# Altium PCB MPBoard_ext.PcbDoc (part 3 of 3)
Units mm, origin at the board's own origin, x right, y up, seen from the top; angles counter-clockwise.
Board outline 305 x 110 mm, 2 copper layers (Top Layer, Bottom Layer), stack 1.571 mm thick; 340 components, 268 nets, 1174 pads, 215 vias.
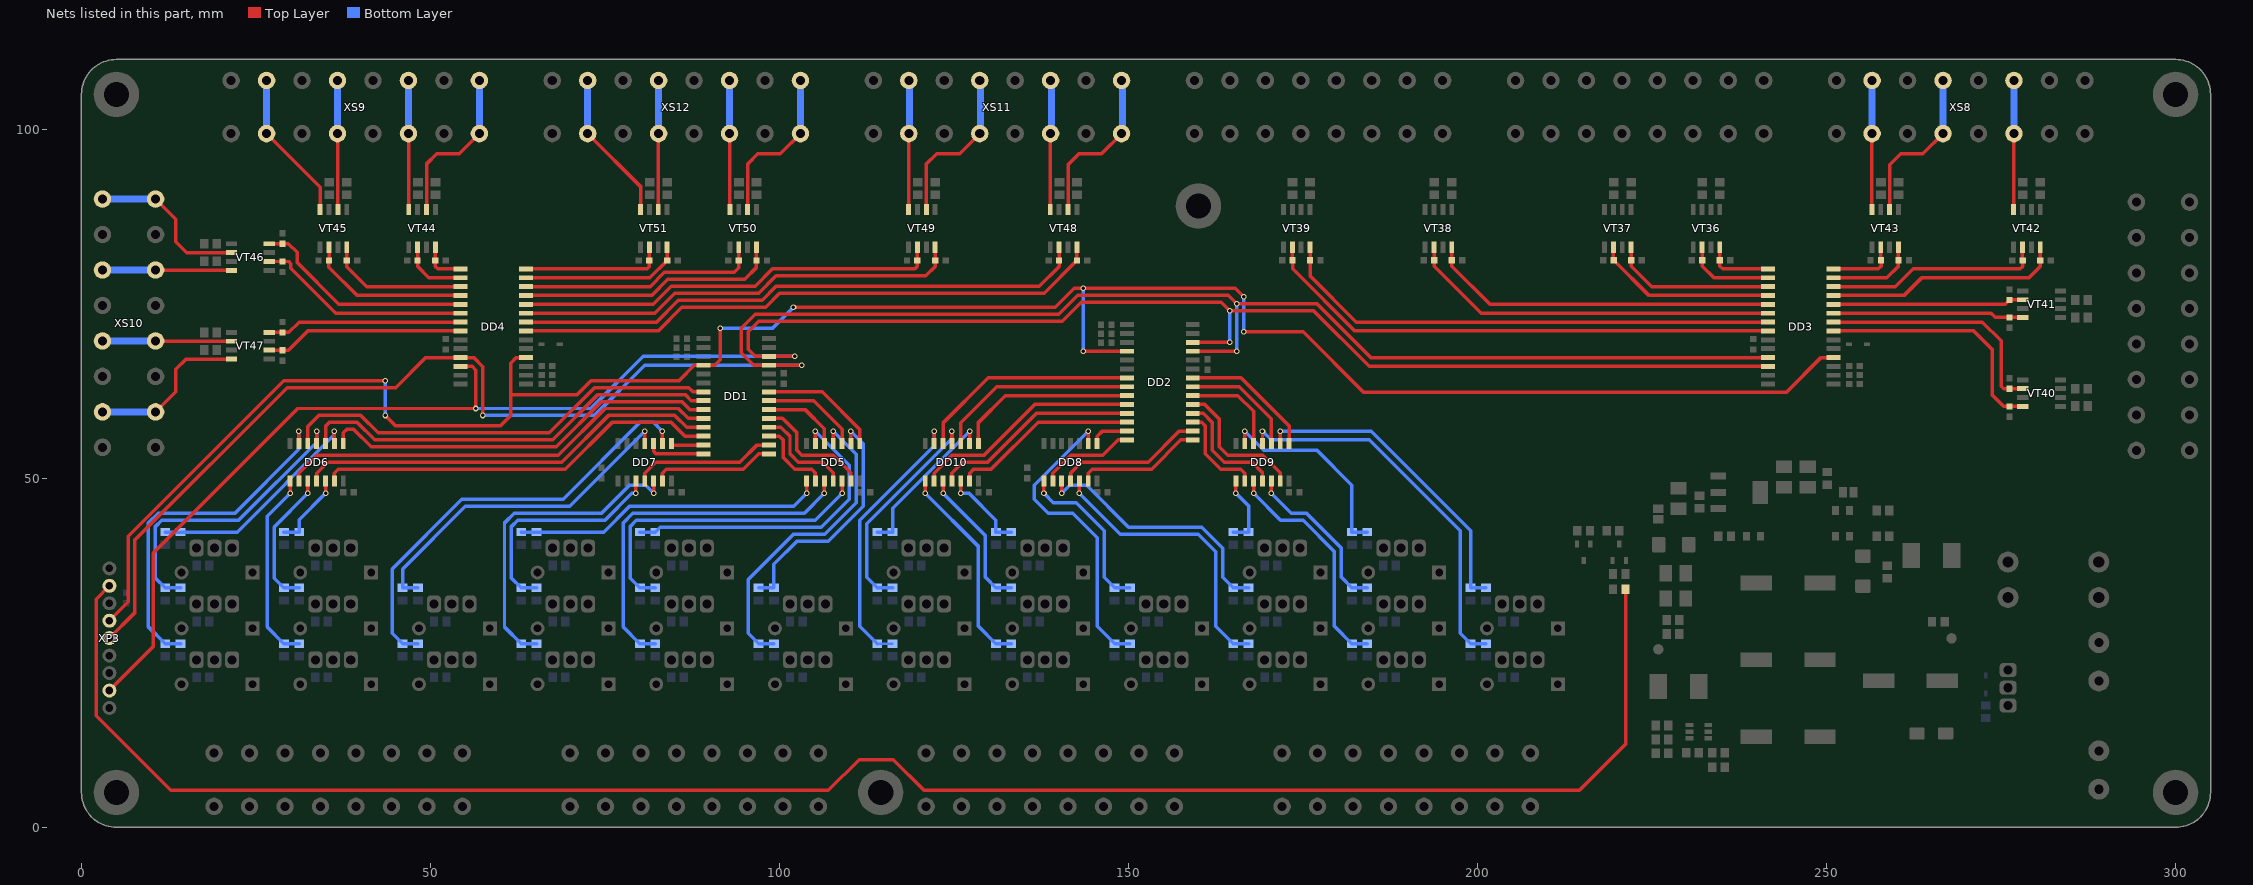
[diagram p3: the nets of this part, all layers, seen from the top]

## Via types
v1: diameter 0.8, hole 0.5, Top Layer to Bottom Layer, 201 vias
v2: diameter 1.6, hole 0.9, Top Layer to Bottom Layer, 8 vias
v3: diameter 1.3, hole 0.6, Top Layer to Bottom Layer, 6 vias

## Nets (pads, with @x,y where several pads share a name; then routed paths per layer and width w, separated by ;. In a path a pad name is that pad's centre, name@x,y a point inside that pad or via, vN(x,y) a via of type N, cw(c..) or ccw(c..) an arc to the next point about the centre after c; other vN are vias at no path point) (continued)
NetVT42_4: VT42.4 XS8.3 XS8.11 | length 18.5
  Top Layer w0.5: VT42.4@276.79,88.5 276.79,99.33 XS8.11@276.84,99.38
  Bottom Layer w1: XS8.11@276.84,99.38 XS8.3@276.84,107
NetVT43_2: VT43.2 XS8.5 XS8.13 | length 23.5
  Top Layer w0.5: VT43.2@259.03,88.5 259.03,94.93 260.6,96.5 263.8,96.5 XS8.13@266.68,99.38
  Bottom Layer w1: XS8.13@266.68,99.38 XS8.5@266.68,107
NetVT43_4: VT43.4 XS8.7 XS8.15 | length 18.5
  Top Layer w0.5: VT43.4@256.49,88.5 256.49,99.35 XS8.15@256.52,99.38
  Bottom Layer w1: XS8.15@256.52,99.38 XS8.7@256.52,107
NetVT44_2: VT44.2 XS9.1 XS9.9 | length 23.5
  Top Layer w0.5: VT44.2@49.43,88.5 49.43,95.03 50.9,96.5 54.12,96.5 XS9.9@57,99.38
  Bottom Layer w1: XS9.9@57,99.38 XS9.1@57,107
NetVT44_4: VT44.4 XS9.3 XS9.11 | length 18.5
  Top Layer w0.5: XS9.11@46.84,99.38 46.89,99.33 VT44.4@46.89,88.5
  Bottom Layer w1: XS9.11@46.84,99.38 XS9.3@46.84,107
NetVT45_2: VT45.2 XS9.5 XS9.13 | length 18.5
  Top Layer w0.5: XS9.13@36.68,99.38 36.73,99.33 VT45.2@36.73,88.5
  Bottom Layer w1: XS9.13@36.68,99.38 XS9.5@36.68,107
NetVT45_4: VT45.4 XS9.7 XS9.15 | length 21.7
  Top Layer w0.5: XS9.15@26.52,99.38 34.19,91.71 VT45.4@34.19,88.5
  Bottom Layer w1: XS9.15@26.52,99.38 XS9.7@26.52,107
NetVT46_2: VT46.2 XS10.1 XS10.9 | length 23.6
  Top Layer w0.5: XS10.9@10.62,90 13.5,87.12 13.5,83.9 15.07,82.33 VT46.2@21.5,82.33
  Bottom Layer w1: XS10.1@3,90 XS10.9@10.62,90
NetVT46_4: VT46.4 XS10.3 XS10.11 | length 18.5
  Top Layer w0.5: XS10.11@10.62,79.84 10.67,79.79 VT46.4@21.5,79.79
  Bottom Layer w1: XS10.3@3,79.84 XS10.11@10.62,79.84
NetVT47_2: VT47.2 XS10.5 XS10.13 | length 18.5
  Top Layer w0.5: XS10.13@10.62,69.68 10.67,69.63 VT47.2@21.5,69.63
  Bottom Layer w1: XS10.5@3,69.68 XS10.13@10.62,69.68
NetVT47_4: VT47.4 XS10.7 XS10.15 | length 23.5
  Top Layer w0.5: XS10.15@10.62,59.52 13.5,62.4 13.5,65.6 14.99,67.09 VT47.4@21.5,67.09
  Bottom Layer w1: XS10.7@3,59.52 XS10.15@10.62,59.52
NetVT48_2: VT48.2 XS11.1 XS11.9 | length 23.6
  Top Layer w0.5: VT48.2@141.33,88.5 141.33,94.93 142.9,96.5 146.12,96.5 XS11.9@149,99.38
  Bottom Layer w1: XS11.9@149.1,99.18 XS11.1@149.1,106.8
NetVT48_4: VT48.4 XS11.3 XS11.11 | length 18.5
  Top Layer w0.5: VT48.4@138.79,88.5 138.79,99.33 XS11.11@138.84,99.38
  Bottom Layer w1: XS11.11@138.94,99.18 XS11.3@138.94,106.8
NetVT49_2: VT49.2 XS11.5 XS11.13 | length 23.6
  Top Layer w0.5: VT49.2@121.03,88.5 121.03,95.03 122.5,96.5 125.8,96.5 XS11.13@128.68,99.38
  Bottom Layer w1: XS11.13@128.78,99.18 XS11.5@128.78,106.8
NetVT49_4: VT49.4 XS11.7 XS11.15 | length 18.5
  Top Layer w0.5: VT49.4@118.49,88.5 118.49,99.35 XS11.15@118.52,99.38
  Bottom Layer w1: XS11.15@118.62,99.18 XS11.7@118.62,106.8
NetVT50_2: VT50.2 XS12.1 XS12.9 | length 23.5
  Top Layer w0.5: VT50.2@95.43,88.5 95.43,95.03 96.9,96.5 100.12,96.5 XS12.9@103,99.38
  Bottom Layer w1: XS12.9@103,99.38 XS12.1@103,107
NetVT50_4: VT50.4 XS12.3 XS12.11 | length 18.5
  Top Layer w0.5: XS12.11@92.84,99.38 92.89,99.33 VT50.4@92.89,88.5
  Bottom Layer w1: XS12.11@92.84,99.38 XS12.3@92.84,107
NetVT51_2: VT51.2 XS12.5 XS12.13 | length 18.5
  Top Layer w0.5: VT51.2@82.63,88.5 82.63,99.33 XS12.13@82.68,99.38
  Bottom Layer w1: XS12.13@82.68,99.38 XS12.5@82.68,107
NetVT51_4: VT51.4 XS12.7 XS12.15 | length 21.6
  Top Layer w0.5: XS12.15@72.52,99.38 80.09,91.81 VT51.4@80.09,88.5
  Bottom Layer w1: XS12.15@72.52,99.38 XS12.7@72.52,107
NSS: DD1.11 DD2.11 DD3.11 DD4.11 XP3.5 | length 311.2
  Top Layer w0.5: XP3.5@4,27.1 7.6,30.7 7.6,41.1 29.5,63 45,63 49.3,67.3 DD4.11@54.3,67.3 56.2,67.3 57.5,66 v1(57.5,59) ; DD1.11@98.5,66.19 v1(103.2,66.19) ; DD1.11@98.5,66.2 96.3,66.2 94.5,68 94.5,71.5 96.5,73.5 140,73.5 142.7,76.2 164.3,76.2 v1(165.5,75) 177,75 184.7,67.3 DD3.11@241.6,67.3 ; DD2.11@159.2,68.2 v1(165.5,68.2)
  Bottom Layer w0.5: v1(57.5,59) 73.5,59 80.69,66.19 v1(103.2,66.19) ; v1(165.5,68.2) v1(165.5,75)
PObuf_1: DD7.12 R16.1 R17.2 | length 46.3
  Top Layer w0.5: v1@81.96,47.855 DD7.12@81.96,49.6
  Bottom Layer w0.5: R16.1@65.2,26.3 R17.2@63,26.3 60.6,28.7 60.6,43.6 62,45 74.5,45 77,47.5 78.5,49 80.815,49 v1(81.965,47.85)
PObuf_2: DD7.10 R19.1 R20.2 | length 33.1
  Top Layer w0.5: v1@79.42,47.855 DD7.10@79.42,49.6
  Bottom Layer w0.5: R19.1@65.2,34.3 R20.2@63,34.3 61.6,35.7 61.6,43.1 62.5,44 75,44 78.85,47.85 v1(79.425,47.85)
PObuf_3: DD5.8 R22.1 R23.2 | length 44.9
  Top Layer w0.5: v1@103.88,47.855 DD5.8@103.88,49.6
  Bottom Layer w0.5: R23.2@63,42.3 R22.1@65.2,42.3 74.8,42.3 78.5,46 102.035,46 v1(103.885,47.85)
PObuf_4: DD5.10 R25.1 R26.2 | length 52.8
  Top Layer w0.5: v1@106.42,47.855 DD5.10@106.42,49.6
  Bottom Layer w0.5: R25.1@82.2,26.3 R26.2@80,26.3 77.6,28.7 77.6,43.6 79,45 103.575,45 v1(106.425,47.85)
PObuf_5: DD5.12 R28.1 R29.2 | length 45.7
  Top Layer w0.5: v1@108.96,47.855 DD5.12@108.96,49.6
  Bottom Layer w0.5: R28.1@82.2,34.3 R29.2@80,34.3 78.6,35.7 78.6,43.1 79.5,44 105.115,44 v1(108.965,47.85)
PObuf_6: DD5.6 R31.1 R32.2 | length 45.5
  Top Layer w0.5: DD5.6@105.15,55 v1@105.15,56.745
  Bottom Layer w0.5: R32.2@80,42.3 R31.1@82.2,42.3 82.9,43 106,43 110,47 110,51.895 v1(105.145,56.75)
PObuf_7: DD5.4 R34.1 R35.2 | length 45.4
  Top Layer w0.5: DD5.4@107.69,55 v1@107.69,56.745
  Bottom Layer w0.5: R34.1@99.2,26.3 R35.2@97,26.3 95.5,27.8 95.5,35.5 102,42 106.5,42 111,46.5 111,53.435 v1(107.685,56.75)
PObuf_8: DD5.2 R37.1 R38.2 | length 35.1
  Top Layer w0.5: DD5.2@110.23,55 v1@110.23,56.745
  Bottom Layer w0.5: R38.2@97,34.3 R37.1@99.2,34.3 99.2,37.7 102.5,41 107,41 112,46 112,54.975 v1(110.225,56.75)
PObuf_9: DD6.6 R40.1 R41.2 | length 50.8
  Top Layer w0.5: DD6.6@31.15,55 v1@31.15,56.745
  Bottom Layer w0.5: R40.1@14.2,26.3 R41.2@12,26.3 9.6,28.7 9.6,43.6 11,45 22,45 31.145,54.145 v1(31.145,56.75)
PObuf_10: DD6.4 R43.1 R44.2 | length 43
  Top Layer w0.5: DD6.4@33.69,55 v1@33.69,56.745
  Bottom Layer w0.5: R43.1@14.2,34.3 R44.2@12,34.3 10.6,35.7 10.6,43.1 11.5,44 22.5,44 33.685,55.185 v1(33.685,56.75)
PObuf_11: DD6.2 R46.1 R47.2 | length 32.3
  Top Layer w0.5: DD6.2@36.23,55 v1@36.23,56.745
  Bottom Layer w0.5: R47.2@12,42.3 R46.1@14.2,42.3 22.3,42.3 36.225,56.225 v1(36.225,56.75)
PObuf_12: DD6.8 R49.1 R50.2 | length 27.8
  Top Layer w0.5: v1@29.88,47.855 DD6.8@29.88,49.6
  Bottom Layer w0.5: v1(29.885,47.85) 26.6,44.565 26.6,28.7 R50.2@29,26.3 R49.1@31.2,26.3
PObuf_13: DD6.10 R52.1 R53.2 | length 20.1
  Top Layer w0.5: v1@32.42,47.855 DD6.10@32.42,49.6
  Bottom Layer w0.5: R52.1@31.2,34.3 R53.2@29,34.3 27.6,35.7 27.6,43.025 v1(32.425,47.85)
PObuf_14: DD6.12 R55.1 R56.2 | length 11.1
  Top Layer w0.5: v1@34.96,47.855 DD6.12@34.96,49.6
  Bottom Layer w0.5: R56.2@29,42.3 R55.1@31.2,42.3 31.2,44.085 v1(34.965,47.85)
PObuf_15: DD7.2 R58.1 R59.2 | length 63.2
  Top Layer w0.5: DD7.2@83.23,55 v1@83.23,56.745
  Bottom Layer w0.5: R58.1@48.2,26.3 R59.2@46,26.3 44.5,27.8 44.5,37 54.5,47 69,47 80,58 81.975,58 v1(83.225,56.75)
PObuf_16: DD7.4 R61.1 R62.2 | length 49.5
  Top Layer w0.5: DD7.4@80.69,55 v1@80.69,56.745
  Bottom Layer w0.5: R61.1@48.2,34.3 R62.2@46,34.3 46,37 55,46 69.935,46 v1(80.685,56.75)
PObuf_17: DD8.12 R67.1 R68.2 | length 41.2
  Top Layer w0.5: DD8.12@142.96,49.6 142.96,47.855 v1(142.965,47.85)
  Bottom Layer w0.5: v1(142.965,47.85) 148.815,42 160,42 162.5,39.5 162.5,28.8 R68.2@165,26.3 R67.1@167.2,26.3
PObuf_18: DD8.10 R70.1 R71.2 | length 37.6
  Top Layer w0.5: DD8.10@140.42,49.6 140.42,47.855 v1(140.425,47.85)
  Bottom Layer w0.5: v1(140.425,47.85) 141.575,49 144,49 150,43 160.5,43 163.5,40 163.5,35.8 R71.2@165,34.3 R70.1@167.2,34.3
PObuf_19: DD9.8 R73.1 R74.2 | length 10.3
  Top Layer w0.5: DD9.8@165.38,49.6 165.38,47.855 v1(165.385,47.85)
  Bottom Layer w0.5: R74.2@165,42.3 R73.1@167.2,42.3 167.2,46.035 v1(165.385,47.85)
PObuf_20: DD9.10 R76.1 R77.2 | length 33.2
  Top Layer w0.5: DD9.10@167.92,49.6 167.92,47.855 v1(167.925,47.85)
  Bottom Layer w0.5: v1(167.925,47.85) 171.775,44 175,44 179.5,39.5 179.5,28.8 R77.2@182,26.3 R76.1@184.2,26.3
PObuf_21: DD9.12 R79.1 R80.2 | length 23.6
  Top Layer w0.5: DD9.12@170.46,49.6 170.46,47.855 v1(170.465,47.85)
  Bottom Layer w0.5: v1(170.465,47.85) 173.315,45 175.5,45 180.5,40 180.5,35.8 R80.2@182,34.3 R79.1@184.2,34.3
PObuf_22: DD9.6 R82.1 R83.2 | length 29.2
  Top Layer w0.5: v1(166.645,56.75) 166.65,56.745 DD9.6@166.65,55
  Bottom Layer w0.5: v1(166.645,56.75) 169.395,54 177,54 182,49 R83.2@182,42.3 R82.1@184.2,42.3
PObuf_23: DD9.4 R85.1 R86.2 | length 55
  Top Layer w0.5: v1(169.185,56.75) 169.19,56.745 DD9.4@169.19,55
  Bottom Layer w0.5: v1(169.185,56.75) 170.435,55.5 184.5,55.5 197.5,42.5 197.5,27.8 R86.2@199,26.3 R85.1@201.2,26.3
PObuf_24: DD9.2 R88.1 R89.2 | length 45.3
  Top Layer w0.5: v1(171.725,56.75) 171.73,56.745 DD9.2@171.73,55
  Bottom Layer w0.5: v1(171.725,56.75) 184.75,56.75 193.5,48 199,42.5 R89.2@199,34.3 R88.1@201.2,34.3
PObuf_25: DD10.6 R91.1 R92.2 | length 39.8
  Top Layer w0.5: v1(122.145,56.75) 122.15,56.745 DD10.6@122.15,55
  Bottom Layer w0.3: R92.2@114,26.3 R91.1@116.2,26.3
  Bottom Layer w0.5: R92.2@114,26.3 111.5,28.8 111.5,44 122.145,54.645 v1(122.145,56.75)
PObuf_26: DD10.4 R94.1 R95.2 | length 32.1
  Top Layer w0.5: v1(124.685,56.75) 124.69,56.745 DD10.4@124.69,55
  Bottom Layer w0.5: R94.1@116.2,34.3 R95.2@114,34.3 112.5,35.8 112.5,40 112.5,43.5 124.685,55.685 v1(124.685,56.75)
PObuf_27: DD10.2 R97.1 R98.2 | length 23
  Top Layer w0.5: v1(127.225,56.75) 127.23,56.745 DD10.2@127.23,55
  Bottom Layer w0.5: R98.2@114,42.3 R97.1@116.2,42.3 116.2,45.725 v1(127.225,56.75)
PObuf_28: DD10.8 R100.1 R101.2 | length 29.7
  Top Layer w0.5: DD10.8@120.88,49.6 120.88,47.855 v1(120.885,47.85)
  Bottom Layer w0.5: v1(120.885,47.85) 128.5,40.235 128.5,28.8 R101.2@131,26.3 R100.1@133.2,26.3
PObuf_29: DD10.10 R103.1 R104.2 | length 20.6
  Top Layer w0.5: DD10.10@123.42,49.6 123.42,47.855 v1(123.425,47.85)
  Bottom Layer w0.5: v1(123.425,47.85) 129.5,41.775 129.5,35.8 R104.2@131,34.3 R103.1@133.2,34.3
PObuf_30: DD10.12 R106.1 R107.2 | length 12.3
  Top Layer w0.5: DD10.12@125.96,49.6 125.96,47.855 v1(125.965,47.85)
  Bottom Layer w0.5: v1(125.965,47.85) 127.15,47.85 131,44 R107.2@131,42.3 R106.1@133.2,42.3
PObuf_31: DD8.2 R109.1 R110.2 | length 44.4
  Top Layer w0.5: v1(144.225,56.75) 144.23,56.745 DD8.2@144.23,55
  Bottom Layer w0.5: v1(144.225,56.75) 136.5,49.025 136.5,47 138.5,45 142,45 145.5,41.5 145.5,28.8 R110.2@148,26.3 R109.1@150.2,26.3
PObuf_32: DD8.8 R112.1 R113.2 | length 23.6
  Top Layer w0.5: DD8.8@137.88,49.6 137.88,47.855 v1(137.885,47.85)
  Bottom Layer w0.5: v1(137.885,47.85) 139.235,46.5 142.5,46.5 146.5,42.5 146.5,35.8 R113.2@148,34.3 R112.1@150.2,34.3
pwrOut_1: DD1.1 DD7.13 | length 17.6
  Top Layer w0.5: DD7.13@83.23,49.6 83.23,50.75 83.78,51.3 94.8,51.3 97,53.5 DD1.1@98.5,53.5
pwrOut_2: DD1.2 DD7.11 | length 20.6
  Top Layer w0.5: DD7.11@80.69,49.6 80.69,50.75 82.24,52.3 94.3,52.3 96.77,54.77 DD1.2@98.5,54.77
pwrOut_3: DD1.3 DD5.9 | length 11.5
  Top Layer w0.5: DD1.3@98.5,56.04 99.96,56.04 100.5,55.5 100.5,53 102.2,51.3 104.6,51.3 105.15,50.75 DD5.9@105.15,49.6
pwrOut_4: DD1.4 DD5.11 | length 14.6
  Top Layer w0.5: DD1.4@98.5,57.31 100.19,57.31 101.5,56 101.5,53.5 102.7,52.3 106.2,52.3 107.69,50.81 DD5.11@107.69,49.6
pwrOut_5: DD1.5 DD5.13 | length 17.6
  Top Layer w0.5: DD1.5@98.5,58.58 100.42,58.58 102.5,56.5 102.5,54 103.2,53.3 107.7,53.3 110.23,50.77 DD5.13@110.23,49.6
pwrOut_6: DD1.6 DD5.5 | length 11.1
  Top Layer w0.5: DD1.6@98.5,59.85 103.65,59.85 106.42,57.08 DD5.5@106.42,55
pwrOut_7: DD1.7 DD5.3 | length 14.2
  Top Layer w0.5: DD1.7@98.5,61.12 104.88,61.12 108.96,57.04 DD5.3@108.96,55
pwrOut_8: DD1.8 DD5.1 | length 17.2
  Top Layer w0.5: DD1.8@98.5,62.39 106.11,62.39 111.5,57 DD5.1@111.5,55
pwrOut_9: DD1.21 DD6.5 | length 63.7
  Top Layer w0.5: DD6.5@32.42,55 32.42,57.42 34,59 40,59 42.5,56.5 67,56.5 73.5,63 87,63 87.61,62.39 DD1.21@89.1,62.39
pwrOut_10: DD1.22 DD6.3 | length 60.9
  Top Layer w0.5: DD6.3@34.96,55 34.96,57.46 35.5,58 39.5,58 42,55.5 67.5,55.5 74,62 86.5,62 87.38,61.12 DD1.22@89.1,61.12
pwrOut_11: DD1.23 DD6.1 | length 57.5
  Top Layer w0.5: DD6.1@37.5,55 37.5,56.5 38,57 39,57 41.5,54.5 68,54.5 74.5,61 86,61 87.15,59.85 DD1.23@89.1,59.85
pwrOut_12: DD1.24 DD6.9 | length 63.5
  Top Layer w0.5: DD6.9@31.15,49.6 31.15,50.75 33.7,53.3 68.3,53.3 75,60 85.5,60 86.92,58.58 DD1.24@89.1,58.58
pwrOut_13: DD1.25 DD6.11 | length 60.7
  Top Layer w0.5: DD6.11@33.69,49.6 33.69,50.75 35.24,52.3 68.8,52.3 75.5,59 85,59 86.69,57.31 DD1.25@89.1,57.31
pwrOut_14: DD1.26 DD6.13 | length 57.8
  Top Layer w0.5: DD6.13@36.23,49.6 36.23,50.75 36.78,51.3 69.3,51.3 76,58 84.5,58 86.46,56.04 DD1.26@89.1,56.04
pwrOut_15: DD1.27 DD7.1 | length 4.8
  Top Layer w0.5: DD7.1@84.5,55 84.5,54.87 84.6,54.77 DD1.27@89.1,54.77
pwrOut_16: DD1.28 DD7.3 | length 8.4
  Top Layer w0.5: DD7.3@81.96,55 81.96,53.84 82.3,53.5 DD1.28@89.1,53.5
pwrOut_17: DD2.1 DD8.13 | length 18.1
  Top Layer w0.5: DD8.13@144.23,49.6 144.23,50.75 144.78,51.3 153.3,51.3 157.5,55.5 DD2.1@159.2,55.5
pwrOut_18: DD2.2 DD8.11 | length 21.2
  Top Layer w0.5: DD8.11@141.69,49.6 141.69,50.75 143.24,52.3 152.8,52.3 157.27,56.77 DD2.2@159.2,56.77
pwrOut_19: DD2.3 DD9.9 | length 14
  Top Layer w0.5: DD2.3@159.2,58.04 160.46,58.04 161,57.5 161,53.5 163.2,51.3 166.1,51.3 166.65,50.75 DD9.9@166.65,49.6
pwrOut_20: DD2.4 DD9.11 | length 17.1
  Top Layer w0.5: DD2.4@159.2,59.31 160.69,59.31 162,58 162,54 163.7,52.3 167.7,52.3 169.19,50.81 DD9.11@169.19,49.6
pwrOut_21: DD2.5 DD9.13 | length 20.1
  Top Layer w0.5: DD2.5@159.2,60.58 160.92,60.58 163,58.5 163,54.5 164.2,53.3 169.2,53.3 171.73,50.77 DD9.13@171.73,49.6
pwrOut_22: DD2.6 DD9.5 | length 14.2
  Top Layer w0.5: DD2.6@159.2,61.85 165.65,61.85 167.92,59.58 DD9.5@167.92,55
pwrOut_23: DD2.7 DD9.3 | length 16.7
  Top Layer w0.5: DD2.7@159.2,63.12 165.88,63.12 170.46,58.54 DD9.3@170.46,55
pwrOut_24: DD2.8 DD9.1 | length 19.2
  Top Layer w0.5: DD2.8@159.2,64.39 166.11,64.39 173,57.5 DD9.1@173,55
pwrOut_25: DD2.21 DD10.5 | length 32
  Top Layer w0.5: DD10.5@123.42,55 123.42,57.92 129.89,64.39 DD2.21@149.8,64.39
pwrOut_26: DD2.22 DD10.3 | length 28.9
  Top Layer w0.5: DD10.3@125.96,55 125.96,57.96 131.12,63.12 DD2.22@149.8,63.12
pwrOut_27: DD2.23 DD10.1 | length 25.9
  Top Layer w0.5: DD10.1@128.5,55 128.5,58 132.35,61.85 DD2.23@149.8,61.85
pwrOut_28: DD2.24 DD10.9 | length 32.9
  Top Layer w0.5: DD10.9@122.15,49.6 122.15,50.75 124.7,53.3 129.3,53.3 136.58,60.58 DD2.24@149.8,60.58
pwrOut_29: DD2.25 DD10.11 | length 29.8
  Top Layer w0.5: DD10.11@124.69,49.6 124.69,50.75 126.24,52.3 129.8,52.3 136.81,59.31 DD2.25@149.8,59.31
pwrOut_30: DD2.26 DD10.13 | length 26.7
  Top Layer w0.5: DD10.13@127.23,49.6 127.23,50.75 127.78,51.3 130.3,51.3 137.04,58.04 DD2.26@149.8,58.04
pwrOut_31: DD2.27 DD8.1 | length 5.6
  Top Layer w0.5: DD8.1@145.5,55 145.5,56 146.27,56.77 DD2.27@149.8,56.77
pwrOut_32: DD2.28 DD8.9 | length 13.8
  Top Layer w0.5: DD8.9@139.15,49.6 139.15,50.75 141.7,53.3 146.3,53.3 148.5,55.5 DD2.28@149.8,55.5
Reset: DD1.18 DD2.18 DD3.18 DD4.18 XP3.6 | length 318.4
  Top Layer w0.5: XP3.6@4,29.6 6.7,32.3 6.7,41.7 29,64 v1(43.5,64) ; v1(43.5,59) 45,57.5 60,57.5 61.5,59 61.5,62 ; DD4.18@63.7,67.3 62.3,67.3 61.5,66.5 61.5,62 ; v1(91.5,71.5) 91.5,67 90.7,66.2 DD1.18@89.1,66.2 87.8,66.2 85.6,64 73,64 71,62 61.5,62 ; v1(102,74.5) 139.5,74.5 142.2,77.2 v1(143.5,77.2) 165.3,77.2 v1(166.5,76) ; v1(143.5,68.2) DD2.18@149.8,68.2 ; v1(166.5,71) 175,71 183.7,62.3 244.2,62.3 249.2,67.3 DD3.18@251,67.3
  Bottom Layer w0.5: v1(43.5,59) v1(43.5,64) ; v1(91.5,71.5) 99,71.5 v1(102,74.5) ; v1(143.5,68.2) v1(143.5,77.2) ; v1(166.5,71) v1(166.5,76)
Resolution_5V: R9.1 XP3.8 | length 271.5
  Top Layer w0.5: XP3.8@4,34.6 2.1,32.7 2.1,16 12.8,5.3 107,5.3 111.4,9.7 116.3,9.7 120.7,5.3 214.6,5.3 221.2,11.9 R9.1@221.2,34.1
SCK: DD1.12 DD2.12 DD3.12 DD4.12 XP3.2 | length 304.9
  Top Layer w0.5: XP3.2@4,19.6 10.3,25.9 10.3,39.3 31,60 v1(56.5,60) 56.5,65.5 55.97,66.03 DD4.12@54.3,66.03 ; DD1.12@98.5,67.46 102.17,67.46 v1(102.2,67.49) ; DD1.12@98.5,67.47 96.53,67.47 95.5,68.5 95.5,71 97,72.5 140.5,72.5 143.2,75.2 163.3,75.2 v1(164.5,74) 176.5,74 184.47,66.03 DD3.12@241.6,66.03 ; DD2.12@159.2,69.47 164.47,69.47 v1(164.5,69.5)
  Bottom Layer w0.5: v1(56.5,60) 73,60 80.49,67.49 v1(102.2,67.49) ; v1(164.5,69.5) v1(164.5,74)
sensIN_1: DD3.1 R115.1 VT36.8 | length 9.8
  Top Layer w0.5: VT36.8@234.7,83.1 R115.1@234.7,81.25 234.7,80.4 235.1,80 DD3.1@241.6,80
sensIN_2: DD3.2 R116.1 VT36.6 | length 12.8
  Top Layer w0.5: R116.1@232.16,81.29 VT36.6@232.16,83.1 ; R116.1@232.2,81.25 232.2,80.4 233.87,78.73 DD3.2@241.6,78.73
sensIN_3: DD3.3 R117.1 VT37.8 | length 23.5
  Top Layer w0.5: VT37.8@222,83.1 R117.1@222,81.25 222,80.4 224.94,77.46 DD3.3@241.6,77.46
sensIN_4: DD3.4 R118.1 VT37.6 | length 26
  Top Layer w0.5: R118.1@219.46,81.29 VT37.6@219.46,83.1 ; R118.1@219.5,81.25 224.56,76.19 DD3.4@241.6,76.19
sensIN_5: DD3.5 R119.1 VT38.8 | length 50.3
  Top Layer w0.5: VT38.8@196.3,83.1 R119.1@196.3,81.25 196.3,80.4 201.78,74.92 DD3.5@241.6,74.92
sensIN_6: DD3.6 R120.1 VT38.6 | length 53.3
  Top Layer w0.5: R120.1@193.76,81.29 VT38.6@193.76,83.1 ; R120.1@193.8,81.25 193.8,80.4 200.55,73.65 DD3.6@241.6,73.65
sensIN_7: DD3.7 R121.1 VT39.8 | length 72.4
  Top Layer w0.5: VT39.8@176,83.1 R121.1@176,81.25 176,79 182.62,72.38 DD3.7@241.6,72.38
sensIN_8: DD3.8 R122.1 VT39.6 | length 74.8
  Top Layer w0.5: R122.1@173.46,81.29 VT39.6@173.46,83.1 ; R122.1@173.5,81.25 173.5,80 182.39,71.11 DD3.8@241.6,71.11
sensIN_9: DD3.21 R123.1 VT40.8 | length 35.4
  Top Layer w0.5: DD3.21@251,71.11 271.09,71.11 273.7,68.5 273.7,61.95 275.35,60.3 R123.1@276.2,60.3 VT40.8@278.1,60.3
sensIN_10: DD3.22 R124.1 VT40.6 | length 34.9
  Top Layer w0.5: DD3.22@251,72.38 272.32,72.38 275,69.7 275,63.2 275.36,62.84 R124.1@276.21,62.84 ; R124.1@276.2,62.85 R124.1@276.21,62.84 ; VT40.6@278.1,62.84 R124.1@276.21,62.84
sensIN_11: DD3.23 R125.1 VT41.8 | length 27.4
  Top Layer w0.5: DD3.23@251,73.65 273.55,73.65 274.15,73.05 R125.1@276.2,73.05 276.21,73.04 VT41.8@278.1,73.04
sensIN_12: DD3.24 R126.1 VT41.6 | length 27.4
  Top Layer w0.5: DD3.24@251,74.92 275.57,74.92 R126.1@276.2,75.55 276.23,75.58 VT41.6@278.1,75.58
sensIN_13: DD3.25 R127.1 VT42.8 | length 34.1
  Top Layer w0.5: DD3.25@251,76.19 261.09,76.19 263.6,78.7 278.95,78.7 280.6,80.35 R127.1@280.6,81.2 VT42.8@280.6,83.1
sensIN_14: DD3.26 R128.1 VT42.6 | length 31
  Top Layer w0.5: DD3.26@251,77.46 259.86,77.46 262.4,80 277.75,80 278.1,80.35 R128.1@278.1,81.2 ; R128.1@278.06,81.24 VT42.6@278.06,83.1
sensIN_15: DD3.27 R129.1 VT43.8 | length 12.7
  Top Layer w0.5: DD3.27@251,78.73 258.63,78.73 260.3,80.4 R129.1@260.3,81.25 VT43.8@260.3,83.1
sensIN_16: DD3.28 R130.1 VT43.6 | length 9.6
  Top Layer w0.5: DD3.28@251,80 257.4,80 257.8,80.4 R130.1@257.8,81.25 ; R130.1@257.76,81.29 VT43.6@257.76,83.1
sensIN_17: DD4.1 R150.1 VT44.8 | length 6.5
  Top Layer w0.5: VT44.8@50.7,83.1 R150.1@50.7,81.2 50.7,80.35 51.05,80 DD4.1@54.3,80
sensIN_18: DD4.2 R151.1 VT44.6 | length 9.6
  Top Layer w0.5: VT44.6@48.16,83.1 48.16,81.21 R151.1@48.15,81.2 48.15,80.35 49.77,78.73 DD4.2@54.3,78.73
sensIN_19: DD4.3 R152.1 VT45.8 | length 20.3
  Top Layer w0.5: VT45.8@38,83.1 R152.1@38,81.2 38,80.3 40.84,77.46 DD4.3@54.3,77.46
sensIN_20: DD4.4 R153.1 VT45.6 | length 23.4
  Top Layer w0.5: VT45.6@35.46,83.1 35.46,81.21 R153.1@35.45,81.2 35.45,80.25 39.51,76.19 DD4.4@54.3,76.19
sensIN_21: DD4.5 R154.1 VT46.8 | length 31.9
  Top Layer w0.5: VT46.8@26.9,83.6 R154.1@28.8,83.6 ; R154.1@28.79,83.61 29.64,83.61 30.89,82.36 30.89,80.91 36.88,74.92 DD4.5@54.3,74.92
sensIN_22: DD4.6 R155.1 VT46.6 | length 30.9
  Top Layer w0.5: VT46.6@26.9,81.06 R155.1@28.79,81.06 ; R155.1@28.8,81.05 R155.1@28.79,81.06 ; DD4.6@54.3,73.65 36.45,73.65 29.99,80.11 29.99,80.76 29.69,81.06 R155.1@28.79,81.06
sensIN_23: DD4.7 R156.1 VT47.8 | length 28
  Top Layer w0.5: VT47.8@26.9,70.9 R156.1@28.8,70.9 29.7,70.9 31.18,72.38 DD4.7@54.3,72.38
sensIN_24: DD4.8 R157.1 VT47.6 | length 28.5
  Top Layer w0.5: VT47.6@26.9,68.36 28.79,68.36 R157.1@28.8,68.35 29.65,68.35 32.41,71.11 DD4.8@54.3,71.11
sensIN_25: DD4.21 R158.1 VT48.8 | length 85
  Top Layer w0.5: DD4.21@63.7,71.11 82.61,71.11 86,74.5 98,74.5 100,76.5 137.9,76.5 R158.1@142.6,81.2 VT48.8@142.6,83.1
sensIN_26: DD4.22 R159.1 VT48.6 | length 82.4
  Top Layer w0.5: DD4.22@63.7,72.38 82.38,72.38 85.5,75.5 97.5,75.5 99.5,77.5 137.2,77.5 140.05,80.35 R159.1@140.05,81.2 140.06,81.21 VT48.6@140.06,83.1
sensIN_27: DD4.23 R160.1 VT49.8 | length 64.1
  Top Layer w0.5: DD4.23@63.7,73.65 82.15,73.65 85,76.5 97,76.5 99.5,79 120.95,79 122.3,80.35 R160.1@122.3,81.2 VT49.8@122.3,83.1
sensIN_28: DD4.24 R161.1 VT49.6 | length 61.1
  Top Layer w0.5: DD4.24@63.7,74.92 81.92,74.92 84.5,77.5 96.5,77.5 99,80 119.4,80 119.75,80.35 R161.1@119.75,81.2 119.76,81.21 VT49.6@119.76,83.1
sensIN_29: DD4.25 R162.1 VT50.8 | length 37.6
  Top Layer w0.5: DD4.25@63.7,76.19 81.69,76.19 84,78.5 95,78.5 96.7,80.2 R162.1@96.7,81.2 VT50.8@96.7,83.1
sensIN_30: DD4.26 R163.1 VT50.6 | length 34.5
  Top Layer w0.5: DD4.26@63.7,77.46 81.46,77.46 83.5,79.5 93.5,79.5 94.15,80.15 R163.1@94.15,81.2 94.155,81.205 94.155,83.095 VT50.6@94.16,83.1
sensIN_31: DD4.27 R164.1 VT51.8 | length 23.1
  Top Layer w0.5: DD4.27@63.7,78.73 81.43,78.73 R164.1@83.9,81.2 VT51.8@83.9,83.1
sensIN_32: DD4.28 R165.1 VT51.6 | length 20.6
  Top Layer w0.5: DD4.28@63.7,80 81.05,80 81.35,80.3 R165.1@81.35,81.2 81.36,81.21 VT51.6@81.36,83.1
pads on no net: DD1.19 DD1.20 DD2.19 DD2.20 DD7.6 DD7.8 DD8.4 DD8.6 XP3.1 XS10.16

## Polygon pours and split planes (outlines as drawn)
GND on Top Layer "DA2_POLY" (solid, pour order 6): 227.5,50 301.5,50 ccw(c301.5,52) 303.5,52 303.5,99 ccw(c302,99) 302,100.5 300,100.5 cw(c300,105) 295.5,105 295.5,106.5 ccw(c293.5,106.5) 293.5,108.5 11.5,108.5 ccw(c11.5,106.5) 9.5,106.5 9.5,105 cw(c5,105) 5,100.5 3,100.5 ccw(c3,99) 1.5,99 1.5,54 ccw(c4,54) 4,51.5 11.586,51.5 ccw(c11.586,58.535) 16.561,53.561 26.646,63.646 ccw(c24.586,65.707) 27.5,65.707 27.5,82.5 277.5,82.5 277.5,59 227.5,59
+5V on Top Layer "DA2_POLY" (solid, pour order 16): 74.25,47.4 cw(c73.9,47.4) 73.9,47.05 73.9,46.55 75.1,46.55 75.1,47.05 cw(c75.1,47.4) 74.75,47.4
+5V on Top Layer "DA2_POLY" (solid, pour order 15): 84.25,47.4 cw(c83.9,47.4) 83.9,47.05 83.9,46.55 85.1,46.55 85.1,47.05 cw(c85.1,47.4) 84.75,47.4
+5V on Top Layer "DA2_POLY" (solid, pour order 14): 111.25,47.4 cw(c110.9,47.4) 110.9,47.05 110.9,46.55 112.1,46.55 112.1,47.05 cw(c112.1,47.4) 111.75,47.4
+5V on Top Layer "DA2_POLY" (solid, pour order 13): 135.25,47.4 cw(c134.9,47.4) 134.9,47.05 134.9,46.55 136.1,46.55 136.1,47.05 cw(c136.1,47.4) 135.75,47.4
+5V on Top Layer "DA2_POLY" (solid, pour order 9): 145.25,47.4 cw(c144.9,47.4) 144.9,47.05 144.9,46.55 146.1,46.55 146.1,47.05 cw(c146.1,47.4) 145.75,47.4
+5V on Top Layer "DA2_POLY" (solid, pour order 12): 128.25,47.4 cw(c127.9,47.4) 127.9,47.05 127.9,46.55 129.1,46.55 129.1,47.05 cw(c129.1,47.4) 128.75,47.4
+5V on Top Layer "DA2_POLY" (solid, pour order 11): 172.75,47.4 cw(c172.4,47.4) 172.4,47.05 172.4,46.55 173.6,46.55 173.6,47.05 cw(c173.6,47.4) 173.25,47.4
NetC15_2 on Top Layer "DA2_POLY" (solid, pour order 2): 242.3,50.4 242.3,45.6 cw(c241.196,45.6) 241.196,44.496 237.627,44.496 cw(c237.627,45.596) 236.527,45.596 236.527,50.396 cw(c237.627,50.396) 237.627,51.496 241.204,51.496 cw(c241.204,50.4)
NetVT1_2 on Top Layer "NONET_L-01_P-001" (solid, pour order 0): 274.5,40.92 277.5,40.92 cw(c277.5,39.42) 279,39.42 279,20.4 cw(c277.5,20.4) 277.5,18.9 274.5,18.9 cw(c274.5,20.4) 273,20.4 273,39.42 cw(c274.5,39.42)
+24V on Top Layer "NONET_L-01_P-001" (solid, pour order 1): 287.559,41.561 290.558,41.561 cw(c290.559,40.061) 292.059,40.061 292.058,18.561 cw(c290.559,18.561) 290.559,17.061 287.558,17.061 cw(c287.558,18.561) 286.059,18.561 286.059,40.061 cw(c287.558,40.061)
GND on Bottom Layer "DA2_POLY" (solid, pour order 8): 181.467,58.999 167,59 ccw(c167,57.5) 165.5,57.5 165.5,56 ccw(c166.707,56) 165.854,55.146 168.146,52.854 ccw(c170.207,54.915) 170.207,52 171.793,52 cw(c171.793,49.089) 173.854,51.146 175.959,49.041 cw(c175.379,48.461) 176.2,48.459 176.2,48 cw(c175.7,48) 175.7,47.5 148.1,47.5 cw(c148.1,48.1) 147.5,48.1 147.5,57 ccw(c145.501,57) 145.5,59 145.207,59 ccw(c145.206,56.089) 143.147,58.146 133.354,48.354 cw(c131.293,50.413) 131.293,47.5 cw(c131.292,49.292) 129.5,49.293 129.5,56.5 ccw(c127,56.5) 127,59 106.5,59 ccw(c106.5,57) 104.5,57 104.5,51 cw(c101,51) 101,47.5 87.5,47.5 cw(c87.5,50) 85,50 85,56.5 ccw(c82.5,56.5) 82.5,59 81.207,59 ccw(c81.206,56.088) 79.146,58.146 71.004,50.004 cw(c65.2,55.807) 65.2,47.6 39.9,47.6 cw(c39.9,50) 37.5,50 37.5,56.5 ccw(c36,56.5) 36,58 32,58 ccw(c32,56.793) 31.146,57.646 22.914,49.414 cw(c14.672,57.657) 14.672,46 11,46 7.354,42.354 ccw(c9.414,40.293) 6.5,40.293 6.5,36 2,36 2,40.793 cw(c4.914,40.793) 2.854,42.854 21.879,61.879 cw(c29.414,54.343) 29.414,65 42.25,65 42.25,59.25 ccw(c44,59.25) 44,57.5 72.085,57.5 ccw(c72.085,62.122) 75.354,58.854 77.793,61.293 cw(c80.707,58.379) 80.707,62.5 102.293,62.5 ccw(c102.293,65.414) 104.354,63.354 105.146,64.146 cw(c105.999,63.294) 106,64.5 167.55,64.5 ccw(c167.55,72.828) 173.439,66.939 cw(c178.414,61.966) 178.414,69 184.85,69 244.086,69 cw(c244.088,60.762) 249.914,66.586 250.586,65.914 ccw(c255.207,70.536) 255.207,64 270,64 cw(c270.001,61.501) 272.5,61.5 272.5,49.5 ccw(c278.534,49.5) 274.268,45.232 278.293,41.207 cw(c274.18,37.089) 280,37.086 280,23.5 cw(c278.002,23.498) 278,21.5 272,21.5 ccw(c271.998,20.502) 271,20.5 271,10 cw(c268.502,9.998) 268.5,7.5 224,7.5 cw(c223.999,11.499) 220,11.5 220,18.672 ccw(c207.14,18.673) 216.232,27.768 187.498,56.502 ccw(c181.469,50.474)

## Keep-outs
Keep-Out Layer:
  lines w0.01: 1,9 1,101 5,101 ccw(c5,105) 9,105 9,109 296,109 296,105 ccw(c300,105) 300,101 304,101 304,9 300,9 ccw(c300,5) 296,5 296,1 9,1 9,5 ccw(c5,5) 5,9 1,9 ; 1,9 1,9

## Other copper
Top Layer:
  pour cut-out: 24,66.2 24,72.2 15,72.2 15,66.2
  pour cut-out: 24,78.9 24,84.9 15,84.9 15,78.9
  pour cut-out: 33.3,86 39.3,86 39.3,95 33.3,95
  pour cut-out: 46,86 52,86 52,95 46,95
  pour cut-out: 79.2,86 85.2,86 85.2,95 79.2,95
  pour cut-out: 92,86 98,86 98,95 92,95
  pour cut-out: 117.6,86 123.6,86 123.6,95 117.6,95
  pour cut-out: 137.8,86 143.8,86 143.8,95 137.8,95
  pour cut-out: 171.3,86 177.3,86 177.3,95 171.3,95
  pour cut-out: 191.6,86 197.6,86 197.6,95 191.6,95
  pour cut-out: 217.3,86 223.3,86 223.3,95 217.3,95
  pour cut-out: 230,86 236,86 236,95 230,95
  pour cut-out: 255.6,86 261.6,86 261.6,95 255.6,95
  pour cut-out: 275.9,86 281.9,86 281.9,95 275.9,95
  pour cut-out: 281,77.74 281,71.74 290,71.74 290,77.74
  pour cut-out: 281,65 281,59 290,59 290,65
  text "Extension Board" at 195,57 h3.2
  text "Version 1.1" at 195.003,53.5 h3.2
  text "02.2025" at 195.355,50 h3.2
Bottom Layer:
  text "Y." at 112,89 h3.2

## Silkscreen, mask and mechanical layers (free items; w line width, h text height)
Top Overlay:
  drawing of 532 lines, arcs and shapes, not listed
  text "8" at 20.914,95.838 h2.1
  text "7" at 26.18,95.838 h2.1
  text "6" at 31.319,95.838 h2.1
  text "5" at 36.219,95.838 h2.1
  text "4" at 41.355,95.838 h2.1
  text "3" at 46.559,95.838 h2.1
  text "2" at 51.456,95.838 h2.1
  text "1" at 56.789,95.833 h2.1
  text "8" at 66.914,95.838 h2.1
  text "7" at 72.18,95.838 h2.1
  text "6" at 77.319,95.838 h2.1
  text "5" at 82.219,95.838 h2.1
  text "4" at 87.355,95.838 h2.1
  text "3" at 92.559,95.838 h2.1
  text "2" at 97.456,95.838 h2.1
  text "1" at 102.789,95.833 h2.1
  text "8" at 112.914,95.838 h2.1
  text "7" at 118.18,95.838 h2.1
  text "6" at 123.319,95.838 h2.1
  text "5" at 128.219,95.838 h2.1
  text "4" at 133.355,95.838 h2.1
  text "3" at 138.559,95.838 h2.1
  text "2" at 143.456,95.838 h2.1
  text "1" at 148.789,95.833 h2.1
  text "8" at 204.914,95.838 h2.1
  text "7" at 210.18,95.838 h2.1
  text "6" at 215.319,95.838 h2.1
  text "5" at 220.219,95.838 h2.1
  text "4" at 225.355,95.838 h2.1
  text "3" at 230.559,95.838 h2.1
  text "2" at 235.456,95.838 h2.1
  text "1" at 240.789,95.833 h2.1
  text "8" at 250.914,95.838 h2.1
  text "7" at 256.18,95.838 h2.1
  text "6" at 261.319,95.838 h2.1
  text "5" at 266.219,95.838 h2.1
  text "4" at 271.355,95.838 h2.1
  text "3" at 276.559,95.838 h2.1
  text "2" at 281.456,95.838 h2.1
  text "1" at 286.789,95.833 h2.1
  text "8" at 158.714,95.738 h2.1
  text "7" at 163.98,95.738 h2.1
  text "6" at 169.119,95.738 h2.1
  text "5" at 174.019,95.738 h2.1
  text "4" at 179.155,95.738 h2.1
  text "3" at 184.359,95.738 h2.1
  text "2" at 189.256,95.738 h2.1
  text "1" at 194.589,95.733 h2.1
  text "1" at 14.167,89.789 h2.1 r90
  text "8" at 292.162,89.274 h2.1 r90
  text "2" at 14.162,84.456 h2.1 r90
  text "7" at 292.162,84.14 h2.1 r90
  text "3" at 14.162,79.559 h2.1 r90
  text "6" at 292.162,78.999 h2.1 r90
  text "4" at 14.162,74.355 h2.1 r90
  text "5" at 292.162,74.099 h2.1 r90
  text "5" at 14.162,69.219 h2.1 r90
  text "4" at 292.162,68.835 h2.1 r90
  text "6" at 14.162,64.319 h2.1 r90
  text "3" at 292.162,63.759 h2.1 r90
  text "7" at 14.162,59.18 h2.1 r90
  text "2" at 292.162,58.856 h2.1 r90
  text "8" at 14.162,53.914 h2.1 r90
  text "1" at 292.167,53.789 h2.1 r90
  text "+24V" at 293.331,30.4 h2.1 r90
  text "1" at 18.789,12.833 h2.1
  text "2" at 23.856,12.838 h2.1
  text "3" at 28.759,12.838 h2.1
  text "4" at 33.835,12.838 h2.1
  text "5" at 39.099,12.838 h2.1
  text "6" at 43.999,12.838 h2.1
  text "7" at 49.14,12.838 h2.1
  text "8" at 54.274,12.838 h2.1
  text "1" at 69.789,12.833 h2.1
  text "2" at 74.856,12.838 h2.1
  text "3" at 79.759,12.838 h2.1
  text "4" at 84.835,12.838 h2.1
  text "5" at 90.099,12.838 h2.1
  text "6" at 94.999,12.838 h2.1
  text "7" at 100.14,12.838 h2.1
  text "8" at 105.274,12.838 h2.1
  text "1" at 120.789,12.833 h2.1
  text "2" at 125.856,12.838 h2.1
  text "3" at 130.759,12.838 h2.1
  text "4" at 135.835,12.838 h2.1
  text "5" at 141.099,12.838 h2.1
  text "6" at 145.999,12.838 h2.1
  text "7" at 151.14,12.838 h2.1
  text "8" at 156.274,12.838 h2.1
  text "1" at 171.789,12.833 h2.1
  text "2" at 176.856,12.838 h2.1
  text "3" at 181.759,12.838 h2.1
  text "4" at 186.835,12.838 h2.1
  text "5" at 192.099,12.838 h2.1
  text "6" at 196.999,12.838 h2.1
  text "7" at 202.14,12.838 h2.1
  text "8" at 207.274,12.838 h2.1
  text "Num:" at 256,3.5 h3.2
Bottom Overlay:
  drawing of 392 lines, arcs and shapes, not listed
Top Solder:
  text "Extension Board" at 195,57 h3.2
  text "Version 1.1" at 195.003,53.5 h3.2
  text "02.2025" at 195.355,50 h3.2
Bottom Solder:
  text "Y." at 112,89 h3.2
Board:
  the board outline again, w0.25